# Altium PCB Acondicionamiento_70Q.PcbDoc
Units mil, origin at the board's own origin, x right, y up, seen from the top; angles counter-clockwise.
Board outline 6000 x 4000 mil, 2 copper layers (Top Layer, Bottom Layer); 14 components, 12 nets, 39 pads, 0 vias.
Unrouted connection lines stored in the file: 5.
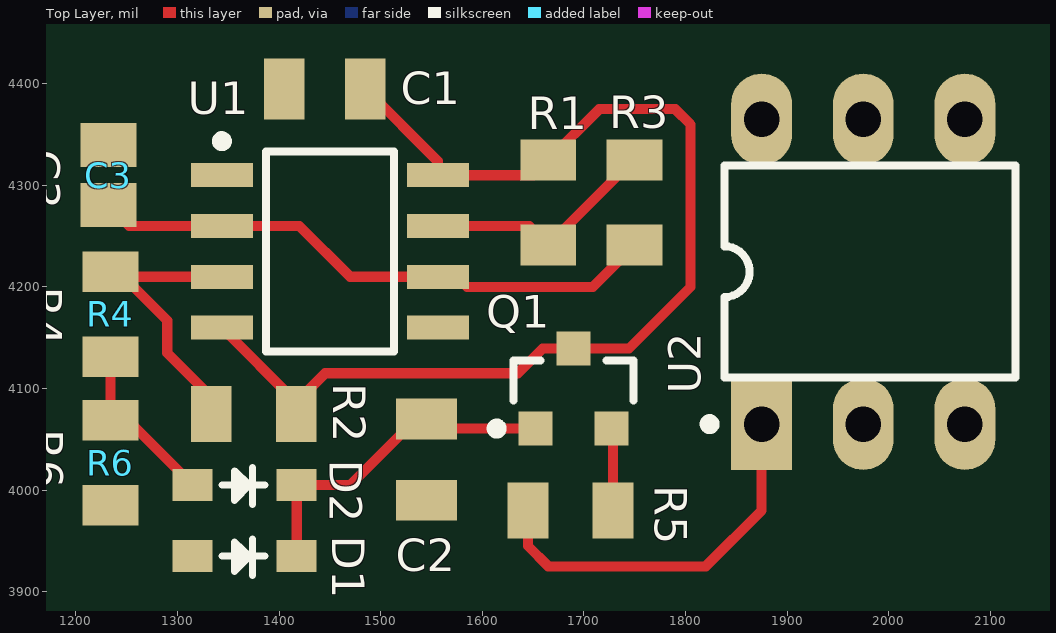
[diagram p0: Top Layer view]
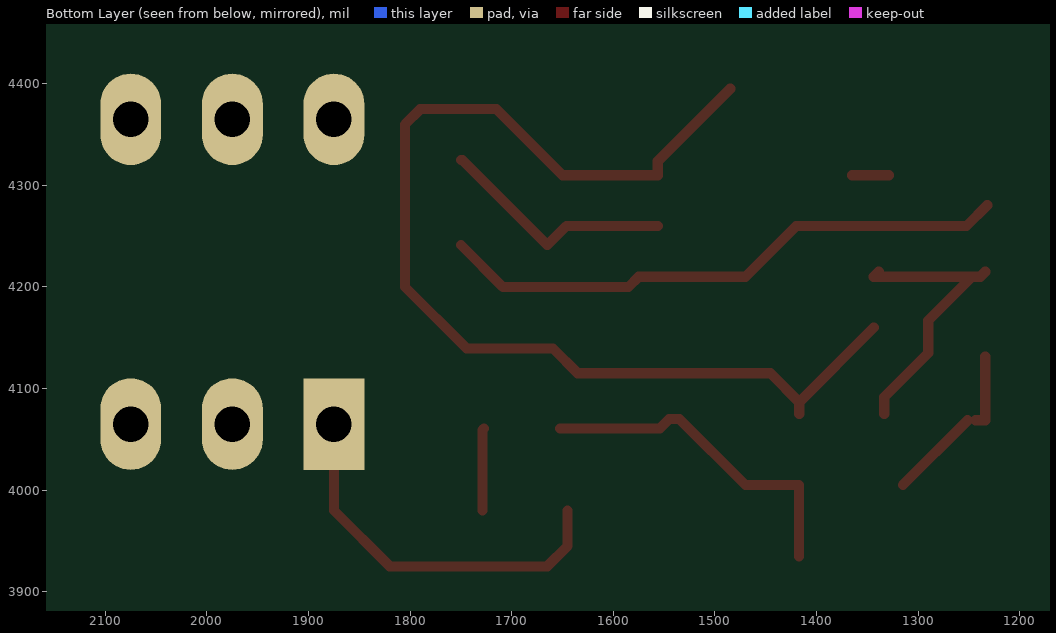
[diagram p1: Bottom Layer view, seen from below]
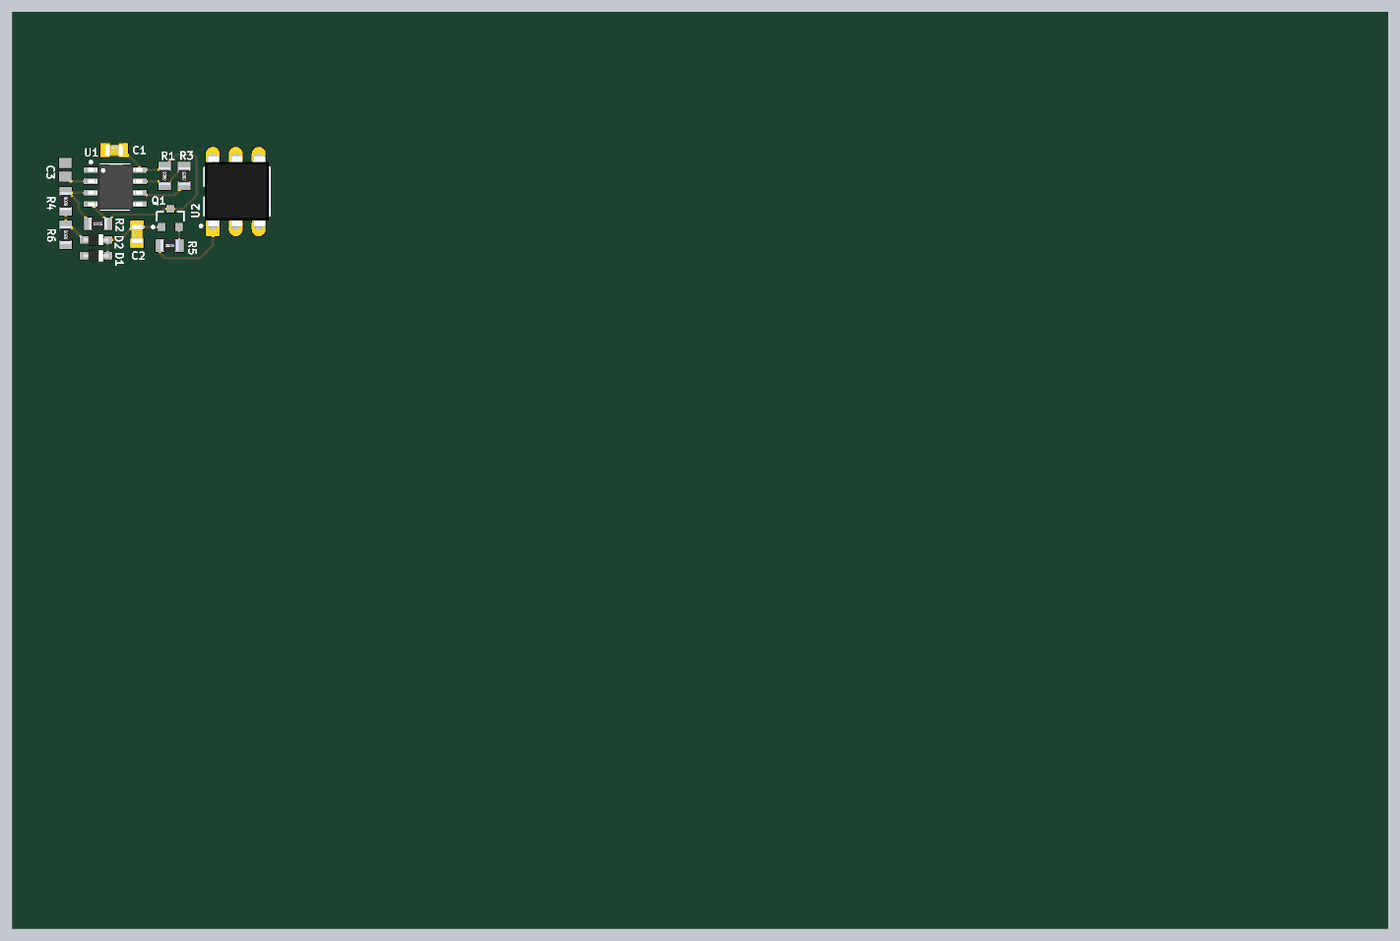
[diagram p2: 3D render of the assembled board from above, using the file's embedded part models]

## Layer stack, top to bottom
Top Solder: solder mask 0.4, Solder Resist, Dk 3.5
Top Layer: signal copper 1.4
Dielectric 1: dielectric 12.6, FR-4, Dk 4.8
Bottom Layer: signal copper 1.4
Bottom Solder: solder mask 0.4, Solder Resist, Dk 3.5

## Board outline
1000,1000 7000,1000 7000,5000 1000,5000

## Design rules (kind name [scope] priority, off if disabled: settings)
Clearance [All] p1: gap=10 ignorepadtopadclearanceinfootprint=FALSE except(0: Arc-Hole Track-Hole SMDPad-Hole THPad-Hole Via-Hole Fill-Hole Poly-Hole Region-Hole Text-Hole)
PolygonConnect [All] p1: connectstyle=Relief reliefconductorwidth=10 reliefentries=4 polygonreliefangle="90 Angle" airgapwidth=10
RoutingVias [All] p1: holewidth=28 width=50 viastyle="Through Hole" minholewidth=28 minwidth=50 maxholewidth=28 maxwidth=50
SolderMaskExpansion [All] p1: expansion=4
Width [All] p1: maxlimit=10 minlimit=10 preferedwidth=10
30 further rules are at their usual default settings.

## Components (designator, comment, footprint, x,y, rotation, side; value= is the part's Value field where it differs from the comment)
C1 "10nF" C0805#1 1405,4395 r0 top
C2 "10nF" C0805#1 1545,3990 r90 top
C3 "100nF" C0805#2 1231.96,4310 r270 top
D1 "1N4148" SOD-323-2 1315,3935 r0 top
D2 "1N4148" SOD-323-2 1315,4005 r0 top
Q1 "BS870Q-7-F" SOT23_3 1690,4100 r90 top
R1 "5.6k" R-0805 1665,4241.26 r90 top
R2 "1K" R-0805 1333.31,4075 r0 top
R3 "4.32k" R-0805 1750,4241.26 r90 top
R4 "100" R-0805 1233.93,4131.26 r90 top
R5 "360" R-0805 1645,3980 r0 top
R6 "100k" R-0805 1233.93,3985 r90 top
U1 "TLC555QDRQ1" SOIC8 1450,4235 r0 top
U2 "G3VM-101BR1" DIP-6 1975,4215 r90 top

## Footprints (in the part's own frame and the unit in brackets; to place one, negate y for a bottom-side part, rotate by r counter-clockwise, add the part's x,y. Pads: shape width x height; smd on the part's side, far side on the other; paste and mask are expansions set on the pad)
C0805#1 [mil]
  rect 40x60 smd paste-30: 1(0,0) 2(80,0)
  body extent 1,-25 79,25, height 31
C0805#2 [mil] "Chip Capacitor, Body 2.0x1.3mm, IPC High Density"
  rect 43.31x55.12 smd: 1(-29.53,0) 2(29.53,0)
  body extent -43,-29 43,29, height 55
DIP-6 [mil] "DIP; 6 Leads; Row Spacing 7.62 mm; Pitch 2.54 mm"
  rect 90x60 hole 35: 1(-150,100)
  oval 90x60 hole 35: 2(-150,0) 3(-150,-100) 4(150,-100) 5(150,0) 6(150,100)
  silkscreen extent -155,-150 104,156, body extent -153,-144 157,136, height 177
R-0805 [mil]
  rect 40x55 smd paste+0: 1(0,0) 2(83.74,0)
  body extent 2,-25 81,25, height 17
SOD-323-2 [mm] "SOD-323-2"
  rect 1x0.8 smd: 1(0,0) 2(2.6,0)
  silkscreen extent 0.74,-0.48 1.8,0.43, body extent 0,-0.68 2.6,0.67, height 1.1
SOIC8 [mm] "SOIC, 8-Leads, Body 4.91x3.90mm, Pitch 1.27mm, IPC Medium Density"
  rect 1.55x0.6 smd: 1(-2.7,1.905) 2(-2.7,0.635) 3(-2.7,-0.635) 4(-2.7,-1.905) 5(2.7,-1.905) 6(2.7,-0.635) 7(2.7,0.635) 8(2.7,1.905)
  silkscreen extent -2.82,-2.5 1.6,2.88, body extent -3,-2.5 3,2.5, height 1.75
SOT23_3 [mm] "CDSOT23-SM712"
  rect 0.85x0.85 smd: 1(-1,0.95) 2(-1,-0.95) 3(1,0)
  silkscreen extent -1.12,-1.5 0.7,2.05, body extent -1.15,-1.43 1.15,1.43, height 1.01

## Part data
C1 C2: library part CAP-10nF/50V, "C0805C103K5RACTU - CAP, 0.01µF, 50V, 10%, X7R, 0805, REEL", Case/Package=0805, Case Code (Metric)=2012, Dielectric=X7R, Manufacturer=KEMET, Manufacturer Part Number=C0805C103K5RACTU, Max Operating Temperature=125°C, Min Operating Temperature=-55°C, Package Quantity=4000, Supplier Part Number 1=01J3314, Tolerance=10%, Voltage=50V, Capacitance=10nF, Case Code (Imperial)=0805, ComponentLink1Description=https://www.mouser.mx/datasheet/2/212/KEM_C1002_X7R_SMD-1102033.pdf, ComponentLink1URL=https://www.mouser.mx/datasheet/2/212/KEM_C1002_X7R_SMD-1102033.pdf, Contact Plating=Tin,Matte, Depth=1.25mm, Height=0.78mm, Lead Pitch=0.75mm, Length=2mm, Mount="Surface Mount", Packaging="Tape and Reel", Precio=$0.20, Pricing 1="1=0.018, 25=0.018, 50=0.018, 100=0.018, 250=0.018, 500=0.018, 1000=0.018 (USD)", Radiation Hardening=No, Stock 1=2341, Supplier 1=Newark, Termination=SMD/SMT, Voltage Rating=50V, Voltage Rating (DC)=50V, Width=1.2mm
C3: library part CAP-0.1uF_0805_B, "CC0805JPX7R8BB104", Capacitance=1uF, Case/Package=1206, Case Code (Metric)=3216, Manufacturer=Yageo, Manufacturer Part Number=CC1206JKX7R9BB105, Max Operating Temperature=125°C, Min Operating Temperature=-55°C, Supplier Part Number 1=603-CC1206JK7R9BB105, Tolerance=5%, Voltage Rating=50V, Case Code (Imperial)=1206, ComponentLink1Description=http://www.yageo.com/documents/recent/UPY-GPHC_X7R_6.3V-to-50V_18.pdf?src-supplier=Digi-Key, ComponentLink1URL=http://www.yageo.com/documents/recent/UPY-GPHC_X7R_6.3V-to-50V_18.pdf?src-supplier=Digi-Key, LatestRevisionDate=17-Jul-2002, LatestRevisionNote="Re-released for DXP Platform.", Mount="Surface Mount", PackageDescription="Radial Cap, Thru-Hole; 2 Leads; 0.3 in Pin Spacing", PackageReference=RAD-0.3, Packaging="Cut Tape", Pricing 1="1=0.48, 10=0.342, 50=0.342, 100=0.197, 500=0.166, 1000=0.124, 2000=0.117, 4000=0.11, 10000=0.102, 24000=0.092 (USD)", Pricing 2="1=0.18, 10=0.091, 50=0.091, 100=0.041, 1000=0.034, 10000=0.024 (USD)", Published=8-Jun-2000, Publisher="Altium Limited", Stock 1=11880, Stock 2=51578, Supplier 1=Mouser, Supplier 2=Mouser, Supplier Part Number 2=603-CC0805JPX7R8BB10
D1 D2: library part DIO-1N4148, "1N4148WS-HG3-08", Manufacturer="Vishay Semiconductors", ComponentLink1Description=http://www.vishay.com/docs/85413/1n4148wsg.pdf?src-supplier=Digi-Key, ComponentLink1URL=http://www.vishay.com/docs/85413/1n4148wsg.pdf?src-supplier=Digi-Key, Manufacturer Part Number=1N4148WS-HG3-08, Precio=$0.481, Pricing 1="1=0.37, 10=0.272, 50=0.272, 100=0.138, 500=0.105, 1000=0.064, 3000=0.055, 6000=0.054, 9000=0.045, 10000=0.045, 24000=0.037 (USD)", Stock 1=9340, Supplier 1=Mouser
Q1: library part MOS_N-BS870Q-7-F, "MOSFET CHANNEL N 41V 60V SOT23", Case/Package=SOT-23, Continuous Drain Current (ID)=250mA, Drain to Source Voltage (Vdss)=60V, Input Capacitance=50pF, Manufacturer=Diodes, Max Operating Temperature=150°C, Max Power Dissipation=300mW, Min Operating Temperature=-55°C, Supplier Part Number 1=621-BS870Q-7-F, ComponentLink1Description=https://www.diodes.com/assets/Datasheets/BS870Q.pdf?src-supplier=Digi-Key, ComponentLink1URL=https://www.diodes.com/assets/Datasheets/BS870Q.pdf?src-supplier=Digi-Key, Manufacturer Part Number=BS870Q-7-F, Mount="Surface Mount", Packaging="Cut Tape", Precio=$0.38, Pricing 1="1=0.29, 10=0.197, 50=0.197, 100=0.083, 1000=0.056, 10000=0.038 (USD)", Rds On Max=5R, Stock 1=2749, Supplier 1=Mouser
R1: library part RES-5.6K/0805, "PCF0805-13-5K6BT1 WELWYN  THIN FILM RESISTOR, 5.6KOHM, 100mW 0.1%", Case/Package=0805, Case Code (Metric)=2012, Manufacturer="TT Welwyn", Manufacturer Part Number=PCF0805-13-5K6-B-T1, Max Operating Temperature=125°C, Min Operating Temperature=-55°C, Package Quantity=1000, Power Rating=100mW, Resistance=5.6kR, Supplier Part Number 1=756-PCF0805135K6BT1, Temperature Coefficient=5ppm/°C, Tolerance=0.1%, Voltage Rating=100V, Case Code (Imperial)=0805, ComponentLink1Description=http://www.mouser.com/ds/2/414/PCF-437472.pdf?src-supplier=Mouser, ComponentLink1URL=http://www.mouser.com/ds/2/414/PCF-437472.pdf?src-supplier=Mouser, ComponentLink2Description=http://www.farnell.com/datasheets/1315872.pdf?src-supplier=Element14, ComponentLink2URL=http://www.farnell.com/datasheets/1315872.pdf?src-supplier=Element14, ComponentLink3Description=http://www.farnell.com/datasheets/1520194.pdf?src-supplier=Element14, ComponentLink3URL=http://www.farnell.com/datasheets/1520194.pdf?src-supplier=Element14, Composition="Thin Film,Metal Film", Depth=1.25mm, Height=0.65mm, Length=2mm, Military Standard=Not, Number of Pins=2, Packaging="Tape and Reel", Precio=$0.99, REACH SVHC="No SVHC", Stock 1=0, Supplier 1=Mouser, Termination=SMD/SMT, Voltage Rating (AC)=100V, Voltage Rating (DC)=100V, Weight=0.000317oz, Width=1.25mm
R2: library part RES-1K/0805, "Thin Film Resistors - SMD 1Kohms .1% 25ppm", Case/Package=0805, Case Code (Metric)=2012, Manufacturer="Vishay Sfernice", Manufacturer Part Number=P-0805E1001BBT1, Max Operating Temperature=125°C, Min Operating Temperature=-55°C, Package Quantity=1000, Power Rating=250mW, Resistance=1kR, Temperature Coefficient=25ppm/°C, Tolerance=0.1%, Voltage Rating=100V, Case Code (Imperial)=0805, ComponentLink1Description=http://www.mouser.com/ds/2/427/pns-65592.pdf?src-supplier=Mouser, ComponentLink1URL=http://www.mouser.com/ds/2/427/pns-65592.pdf?src-supplier=Mouser, Composition="Thin Film", Height=0.015inch, Length=0.08inch, Packaging="Tape and Reel", Precio=$1.64, Pricing 1="1=1.26, 10=1.04, 50=1.04, 100=0.796, 500=0.685, 1000=0.54, 2000=0.504, 5000=0.479, 10000=0.461, 25000=0.447 (USD)", Stock 1=1066, Supplier 1=Mouser, Termination=SMD/SMT, Weight=0.000194oz, Width=0.05inch
R3: library part Res-4.32k, "ERA-6AEB4321V", Case/Package=0805, Case Code (Metric)=2012, Manufacturer=Panasonic, Max Operating Temperature=155°C, Max Power Dissipation=125mW, Min Operating Temperature=-55°C, Package Quantity=5000, Resistance=4.32kR, Supplier Part Number 1=667-ERA-6AEB4321V, Temperature Coefficient=25ppm/°C, Tolerance=0.1%, Voltage Rating=100V, Case Code (Imperial)=0805, ComponentLink1Description=http://www.farnell.com/datasheets/485442.pdf?src-supplier=Farnell, ComponentLink1URL=http://www.farnell.com/datasheets/485442.pdf?src-supplier=Farnell, ComponentLink2Description=http://www.mouser.com/ds/2/315/AOA0000CE26-32660.pdf?src-supplier=Mouser, ComponentLink2URL=http://www.mouser.com/ds/2/315/AOA0000CE26-32660.pdf?src-supplier=Mouser, ComponentLink3Description=http://www.farnell.com/datasheets/485442.pdf?src-supplier=Element14, ComponentLink3URL=http://www.farnell.com/datasheets/485442.pdf?src-supplier=Element14, ComponentLink4Description=http://industrial.panasonic.com/www-data/pdf/AOA0000/AOA0000CE26.pdf?src-supplier=Avnet+Europe, ComponentLink4URL=http://industrial.panasonic.com/www-data/pdf/AOA0000/AOA0000CE26.pdf?src-supplier=Avnet+Europe, ComponentLink5Description=http://uk.rs-online.com/webdocs/0eb1/0900766b80eb1d8c.pdf?src-supplier=RSComponents, ComponentLink5URL=http://uk.rs-online.com/webdocs/0eb1/0900766b80eb1d8c.pdf?src-supplier=RSComponents, ComponentLink6Description=https://produktinfo.conrad.com/datenblaetter/450000-474999/459076-da-01-en-WIDERSTAND_0805_ERA.pdf?src-supplier=Conrad, ComponentLink6URL=https://produktinfo.conrad.com/datenblaetter/450000-474999/459076-da-01-en-WIDERSTAND_0805_ERA.pdf?src-supplier=Conrad, Composition="Metal Film,Thin Film", Contact Plating=Tin, Depth=1.25mm, Features="Automotive AEC-Q200", Height=0.5mm, Lead Free="Lead Free", Length=2mm, Manufacturer Part Number=ERA-6AEB4321V, Military Standard=Not, Mount="Surface Mount", Number of Pins=2, Number of Terminations=2, Packaging="Tape and Reel", Power Rating=125mW, Pricing 1="1=0.36, 10=0.302, 50=0.302, 100=0.118, 1000=0.045, 10000=0.034 (USD)", Radiation Hardening=No, Stock 1=7358, Supplier 1=Mouser, Termination=SMD/SMT, Voltage Rating (DC)=100V, Width=1.25mm
R4: library part RES-100, "MCU08050C1000FP500", Case/Package=0805, Case Code (Metric)=2012, Manufacturer="Vishay Beyschlag", Max Operating Temperature=125°C, Max Power Dissipation=200mW, Min Operating Temperature=-55°C, Package Quantity=1, Power Rating=125mW, Resistance=100R, Temperature Coefficient=50ppm/°C, Tolerance=1%, Voltage Rating=150V, Case Code (Imperial)=0805, ComponentLink1Description=http://www.vishay.com/docs/28705/mcx0x0xpro.pdf?src-supplier=Digi-Key, ComponentLink1URL=http://www.vishay.com/docs/28705/mcx0x0xpro.pdf?src-supplier=Digi-Key, ComponentLink2Description=http://www.vishay.com/docs/28705/mc_pro.pdf?src-supplier=Avnet, ComponentLink2URL=http://www.vishay.com/docs/28705/mc_pro.pdf?src-supplier=Avnet, ComponentLink3Description=http://www.vishay.com/docs/28705/mc_pro.pdf?src-supplier=Avnet+Europe, ComponentLink3URL=http://www.vishay.com/docs/28705/mc_pro.pdf?src-supplier=Avnet+Europe, Composition="Thin Film", Contact Plating=Tin, Depth=1.25mm, Height=0.024inch, Lead Free="Lead Free", Length=2mm, Manufacturer Part Number=MCU08050C1000FP500, Military Standard=Not, Number of Terminations=2, Packaging="Tape and Reel", Precio=$0.65, Pricing 1="1=0.5, 10=0.285, 50=0.285, 100=0.153, 500=0.123, 1000=0.091, 2500=0.079, 5000=0.072, 10000=0.064, 25000=0.06 (USD)", Radiation Hardening=No, REACH SVHC="No SVHC", Stock 1=19308, Supplier 1=Mouser, Termination=SMD/SMT, Voltage Rating (DC)=150V, Weight=0.000162oz, Width=0.049inch
R5: library part RES-360, "ERJ-6ENF3600V            RESISTOR, THICK FILM, 360OHM, 125mW, ± 1%", Case/Package=0805, Case Code (Metric)=2012, Manufacturer=Panasonic, Manufacturer Part Number=ERJ-6ENF3600V, Max Operating Temperature=155°C, Max Power Dissipation=125mW, Min Operating Temperature=-55°C, Package Quantity=1, Resistance=360R, Supplier Part Number 1=52W0059, Temperature Coefficient=100ppm/°C, Tolerance=1%, Voltage Rating=150V, Case Code (Imperial)=0805, ComponentLink1Description=http://industrial.panasonic.com/www-data/pdf/AOA0000/AOA0000CE2.pdf?src-supplier=Avnet+Europe, ComponentLink1URL=http://industrial.panasonic.com/www-data/pdf/AOA0000/AOA0000CE2.pdf?src-supplier=Avnet+Europe, ComponentLink2Description=https://www.alliedelec.com/m/d/623f45ff1957d936ff56d46fd1c28cac.pdf?src-supplier=Allied+Electronics, ComponentLink2URL=https://www.alliedelec.com/m/d/623f45ff1957d936ff56d46fd1c28cac.pdf?src-supplier=Allied+Electronics, ComponentLink3Description=http://www.mouser.com/ds/2/315/AOA0000CE2-37512.pdf?src-supplier=Mouser, ComponentLink3URL=http://www.mouser.com/ds/2/315/AOA0000CE2-37512.pdf?src-supplier=Mouser, ComponentLink4Description=http://industrial.panasonic.com/www-data/pdf/AOA0000/AOA0000CE2.pdf?src-supplier=Avnet, ComponentLink4URL=http://industrial.panasonic.com/www-data/pdf/AOA0000/AOA0000CE2.pdf?src-supplier=Avnet, ComponentLink5Description=http://www.farnell.com/datasheets/1678782.pdf?src-supplier=Element14, ComponentLink5URL=http://www.farnell.com/datasheets/1678782.pdf?src-supplier=Element14, Composition="Thick Film", Contact Plating=Tin, Depth=1.25mm, Features="Automotive AEC-Q200", Height=0.6mm, Lead Free="Lead Free", Length=2mm, Military Standard=Not, Mount="Surface Mount", Number of Terminations=2, Packaging="Tape and Reel", Power Rating=125mW, Precio=$0.012, Radiation Hardening=No, REACH SVHC="No SVHC", Stock 1=0, Supplier 1=Newark, Termination=SMD/SMT, Voltage Rating (DC)=150V, Width=0.049inch
R6: library part RES-100k/0805, "TNPW0805100KBEEA Res Thick Film 1206 100K Ohm 1% 0.25W(1/4W) ±100ppm/C Pad SMD T/R", Case/Package=0805, Case Code (Metric)=2012, Manufacturer="Vishay Dale", Manufacturer Part Number=TNPW0805100KBEEA, Max Operating Temperature=125°C, Max Power Dissipation=125mW, Min Operating Temperature=-55°C, Package Quantity=1, Resistance=100kR, Temperature Coefficient=25ppm/°C, Tolerance=0.1%, Voltage Rating=100V, Case Code (Imperial)=0805, ComponentLink1Description=http://www.bourns.com/pdfs/chpreztr.pdf?src-supplier=Avnet+Europe, ComponentLink1URL=http://www.bourns.com/pdfs/chpreztr.pdf?src-supplier=Avnet+Europe, ComponentLink2Description=http://www.farnell.com/datasheets/1902866.pdf?src-supplier=Element14, ComponentLink2URL=http://www.farnell.com/datasheets/1902866.pdf?src-supplier=Element14, ComponentLink3Description=http://www.farnell.com/datasheets/691949.pdf?src-supplier=Element14, ComponentLink3URL=http://www.farnell.com/datasheets/691949.pdf?src-supplier=Element14, ComponentLink4Description=http://www.produktinfo.conrad.com/datenblaetter/1000000-1099999/001055523-da-01-en-SMD_WID_CR1206_FX_1003ELF_100K_OHM_1_4W.pdf?src-supplier=Conrad, ComponentLink4URL=http://www.produktinfo.conrad.com/datenblaetter/1000000-1099999/001055523-da-01-en-SMD_WID_CR1206_FX_1003ELF_100K_OHM_1_4W.pdf?src-supplier=Conrad, ComponentLink5Description=http://www.farnell.com/datasheets/2049119.pdf?src-supplier=Element14, ComponentLink5URL=http://www.farnell.com/datasheets/2049119.pdf?src-supplier=Element14, ComponentLink6Description=http://www.farnell.com/datasheets/1344517.pdf?src-supplier=Element14, ComponentLink6URL=http://www.farnell.com/datasheets/1344517.pdf?src-supplier=Element14, ComponentLink7Description=http://www.vishay.com/docs/49252/_dbr_smd_resistor_product_overview_vmn_sg2189_1705.pdf?src-supplier=Digi-Key, ComponentLink7URL=http://www.vishay.com/docs/49252/_dbr_smd_resistor_product_overview_vmn_sg2189_1705.pdf?src-supplier=Digi-Key, ComponentLink8Description=http://www.vishay.com/docs/28758/tnpw_e3.pdf?src-supplier=Digi-Key, ComponentLink8URL=http://www.vishay.com/docs/28758/tnpw_e3.pdf?src-supplier=Digi-Key, ComponentLink9Description=http://www.vishay.com/docs/28758/tnpw_e3.pdf?src-supplier=Future+Electronics, ComponentLink9URL=http://www.vishay.com/docs/28758/tnpw_e3.pdf?src-supplier=Future+Electronics, ComponentLink10Description=http://www.vishay.com/docs/28758/tnpw_e3.pdf?src-supplier=Avnet, ComponentLink10URL=http://www.vishay.com/docs/28758/tnpw_e3.pdf?src-supplier=Avnet, ComponentLink11Description=https://www.alliedelec.com/m/d/50d2ac1c48d1d3072c857498c4cadcee.pdf?src-supplier=Allied+Electronics, ComponentLink11URL=https://www.alliedelec.com/m/d/50d2ac1c48d1d3072c857498c4cadcee.pdf?src-supplier=Allied+Electronics, Composition="Thin Film", Contact Plating=Tin, Depth=1.25mm, Features="Moisture Resistant,Automotive AEC-Q200,Anti-Sulfur", Height=0.45mm, Lead Free="Lead Free", Length=2mm, Military Standard=Not, Number of Terminations=2, Packaging="Tape and Reel", Power Rating=125mW, Precio=$0.306, Pricing 1="10=0.969, 25=0.688, 50=0.614, 100=0.539, 250=0.482, 500=0.391, 1000=0.318 (USD)", Radiation Hardening=No, REACH SVHC=Unknown, Stock 1=3964, Supplier 1=Newark, Termination=SMD/SMT, Voltage Rating (DC)=100V, Weight=0.000194oz, Width=1.2mm
U1: library part Timer-TLC555-Q1, "Standard Timer Single Automotive 8-Pin SOIC T/R", Case/Package=SOIC, Frequency=2.1MHz, High Level Output Current=-10mA, Low Level Output Current=100mA, Manufacturer="Texas Instruments", Max Operating Temperature=125°C, Max Power Dissipation=725mW, Max Supply Voltage=15V, Min Operating Temperature=-40°C, Min Supply Voltage=2V, Nominal Supply Current=170uA, Operating Supply Current=360uA, Package Quantity=2500, Supplier Part Number 1=595-TLC555QDRQ1, ComponentLink1Description=http://focus.ti.com/lit/ds/symlink/tlc555-q1.pdf?src-supplier=Avnet, ComponentLink1URL=http://focus.ti.com/lit/ds/symlink/tlc555-q1.pdf?src-supplier=Avnet, ComponentLink2Description=http://www.farnell.com/datasheets/1806066.pdf?src-supplier=Element14, ComponentLink2URL=http://www.farnell.com/datasheets/1806066.pdf?src-supplier=Element14, ComponentLink3Description=https://www.verical.com/server-webapp/html/getDatasheet?partID=297376&src-supplier=Verical, ComponentLink3URL=https://www.verical.com/server-webapp/html/getDatasheet?partID=297376&src-supplier=Verical, ComponentLink4Description=http://www.ti.com/lit/ds/symlink/tlc555-q1.pdf?src-supplier=Digi-Key, ComponentLink4URL=http://www.ti.com/lit/ds/symlink/tlc555-q1.pdf?src-supplier=Digi-Key, Contact Plating=Gold, Lead Free="Lead Free", Manufacturer Part Number=TLC555QDRQ1, Mount="Surface Mount", Number of Pins=8, Number of Timers/Counters=1, Packaging="Tape and Reel", Power Dissipation=725mW, Pricing 1="1=0.83, 10=0.706, 50=0.706, 100=0.542, 500=0.479, 1000=0.378, 2500=0.336, 10000=0.323, 22500=0.313, 50000=0.303 (USD)", Quiescent Current=170uA, Radiation Hardening=No, REACH SVHC="No SVHC", Stock 1=30836, Supplier 1=Mouser, Weight=0.002561oz
U2: library part Optoacoplador-G3VM-101BR1, "G3VM-101BR1 Mosfet Relay SPST 4A 6DIP", Manufacturer=Omron, Supplier Part Number 1=653-G3VM-101BR1, Manufacturer Part Number=G3VM-101BR1, Pricing 1="1=11.92, 10=11.18, 25=9.94, 50=9.44, 100=8.95, 250=7.95, 500=7.45, 1000=6.96, 2500=6.71, 10000=6.96 (USD)", Stock 1=175, Supplier 1=Mouser

## Nets (pads, with @x,y where several pads share a name; then routed paths per layer and width w, separated by ;. In a path a pad name is that pad's centre, name@x,y a point inside that pad or via, vN(x,y) a via of type N, cw(c..) or ccw(c..) an arc to the next point about the centre after c; other vN are vias at no path point)
5V: C1.2 Q1.3 R1.2 R2.2 U1.4 U1.8 | length 1106.7
  Top Layer w10: U1.4 R2.2@1417.05,4086.65 ; R2.2 R2.2@1417.05,4086.65 ; C1.2 1556.3,4323.7 U1.8 1650,4310 R1.2 1715,4375 1790,4375 1805,4360 1805,4200 1744.37,4139.37 Q1.3 1659.37,4139.37 1635,4115 1445.39,4115 R2.2@1417.05,4086.65
72V: U2.6
GND1: C1.1 C2.1 C3.1 R6.1 U1.1 U2.2 | length 36.3
  Top Layer w10: U1.1@1328.7,4310 U1.1 U1.1@1365,4310
GND2: U2.4
IN_DIG: D1.1
NetC2_2: C2.2 D1.2 D2.2 Q1.1 | length 336
  Top Layer w10: D1.2 D2.2 1470,4005 1535,4070 C2.2 1554.37,4060.63 Q1.1
NetC3_2: C3.2 R3.1 U1.2 U1.6 | length 568.5
  Top Layer w10: C3.2 1252.44,4260 U1.2 1420,4260 1470,4210 U1.6 1575,4210 1585,4200 1708.74,4200 R3.1
NetD2_1: D2.1 R4.1 R6.2 | length 162
  Top Layer w10: R4.1 R6.2 R6.2@1243.23,4068.74 ; R6.2@1251.26,4068.74 D2.1
NetQ1_2: Q1.2 R5.2 | length 81.2
  Top Layer w10: Q1.2 1728.74,4059.29 R5.2
NetR1_1: R1.1 R3.2 U1.7 | length 236.1
  Top Layer w10: U1.7 1646.26,4260 R1.1 1748.74,4325 R3.2
NetR5_1: R5.1 U2.1 | length 381.1
  Top Layer w10: R5.1 1645,3945 1665,3925 1820,3925 1875,3980 U2.1
OUT: R2.1 R4.2 U1.3 | length 289.7
  Top Layer w10: R4.2 1238.93,4210 R4.2@1246.96,4210 ; R2.1 1333.31,4091.69 1290,4135 1290,4166.96 R4.2@1246.96,4210 ; U1.3@1338.7,4215 U1.3 R4.2@1246.96,4210
pads on no net: U1.5 U2.3 U2.5